# Altium PCB vt18_cpu_board.PcbDoc (part 6 of 7)
Units mil, origin at the board's own origin, x right, y up, seen from the top; angles counter-clockwise.
Board outline 2283.46 x 2244.09 mil, 8 copper layers (Top Layer, GND1, Signal Layer 1, POWER1, POWER2, Signal Layer 2, GND2, Bottom Layer), stack 66.304 mil thick; 339 components, 286 nets, 1965 pads, 1047 vias.
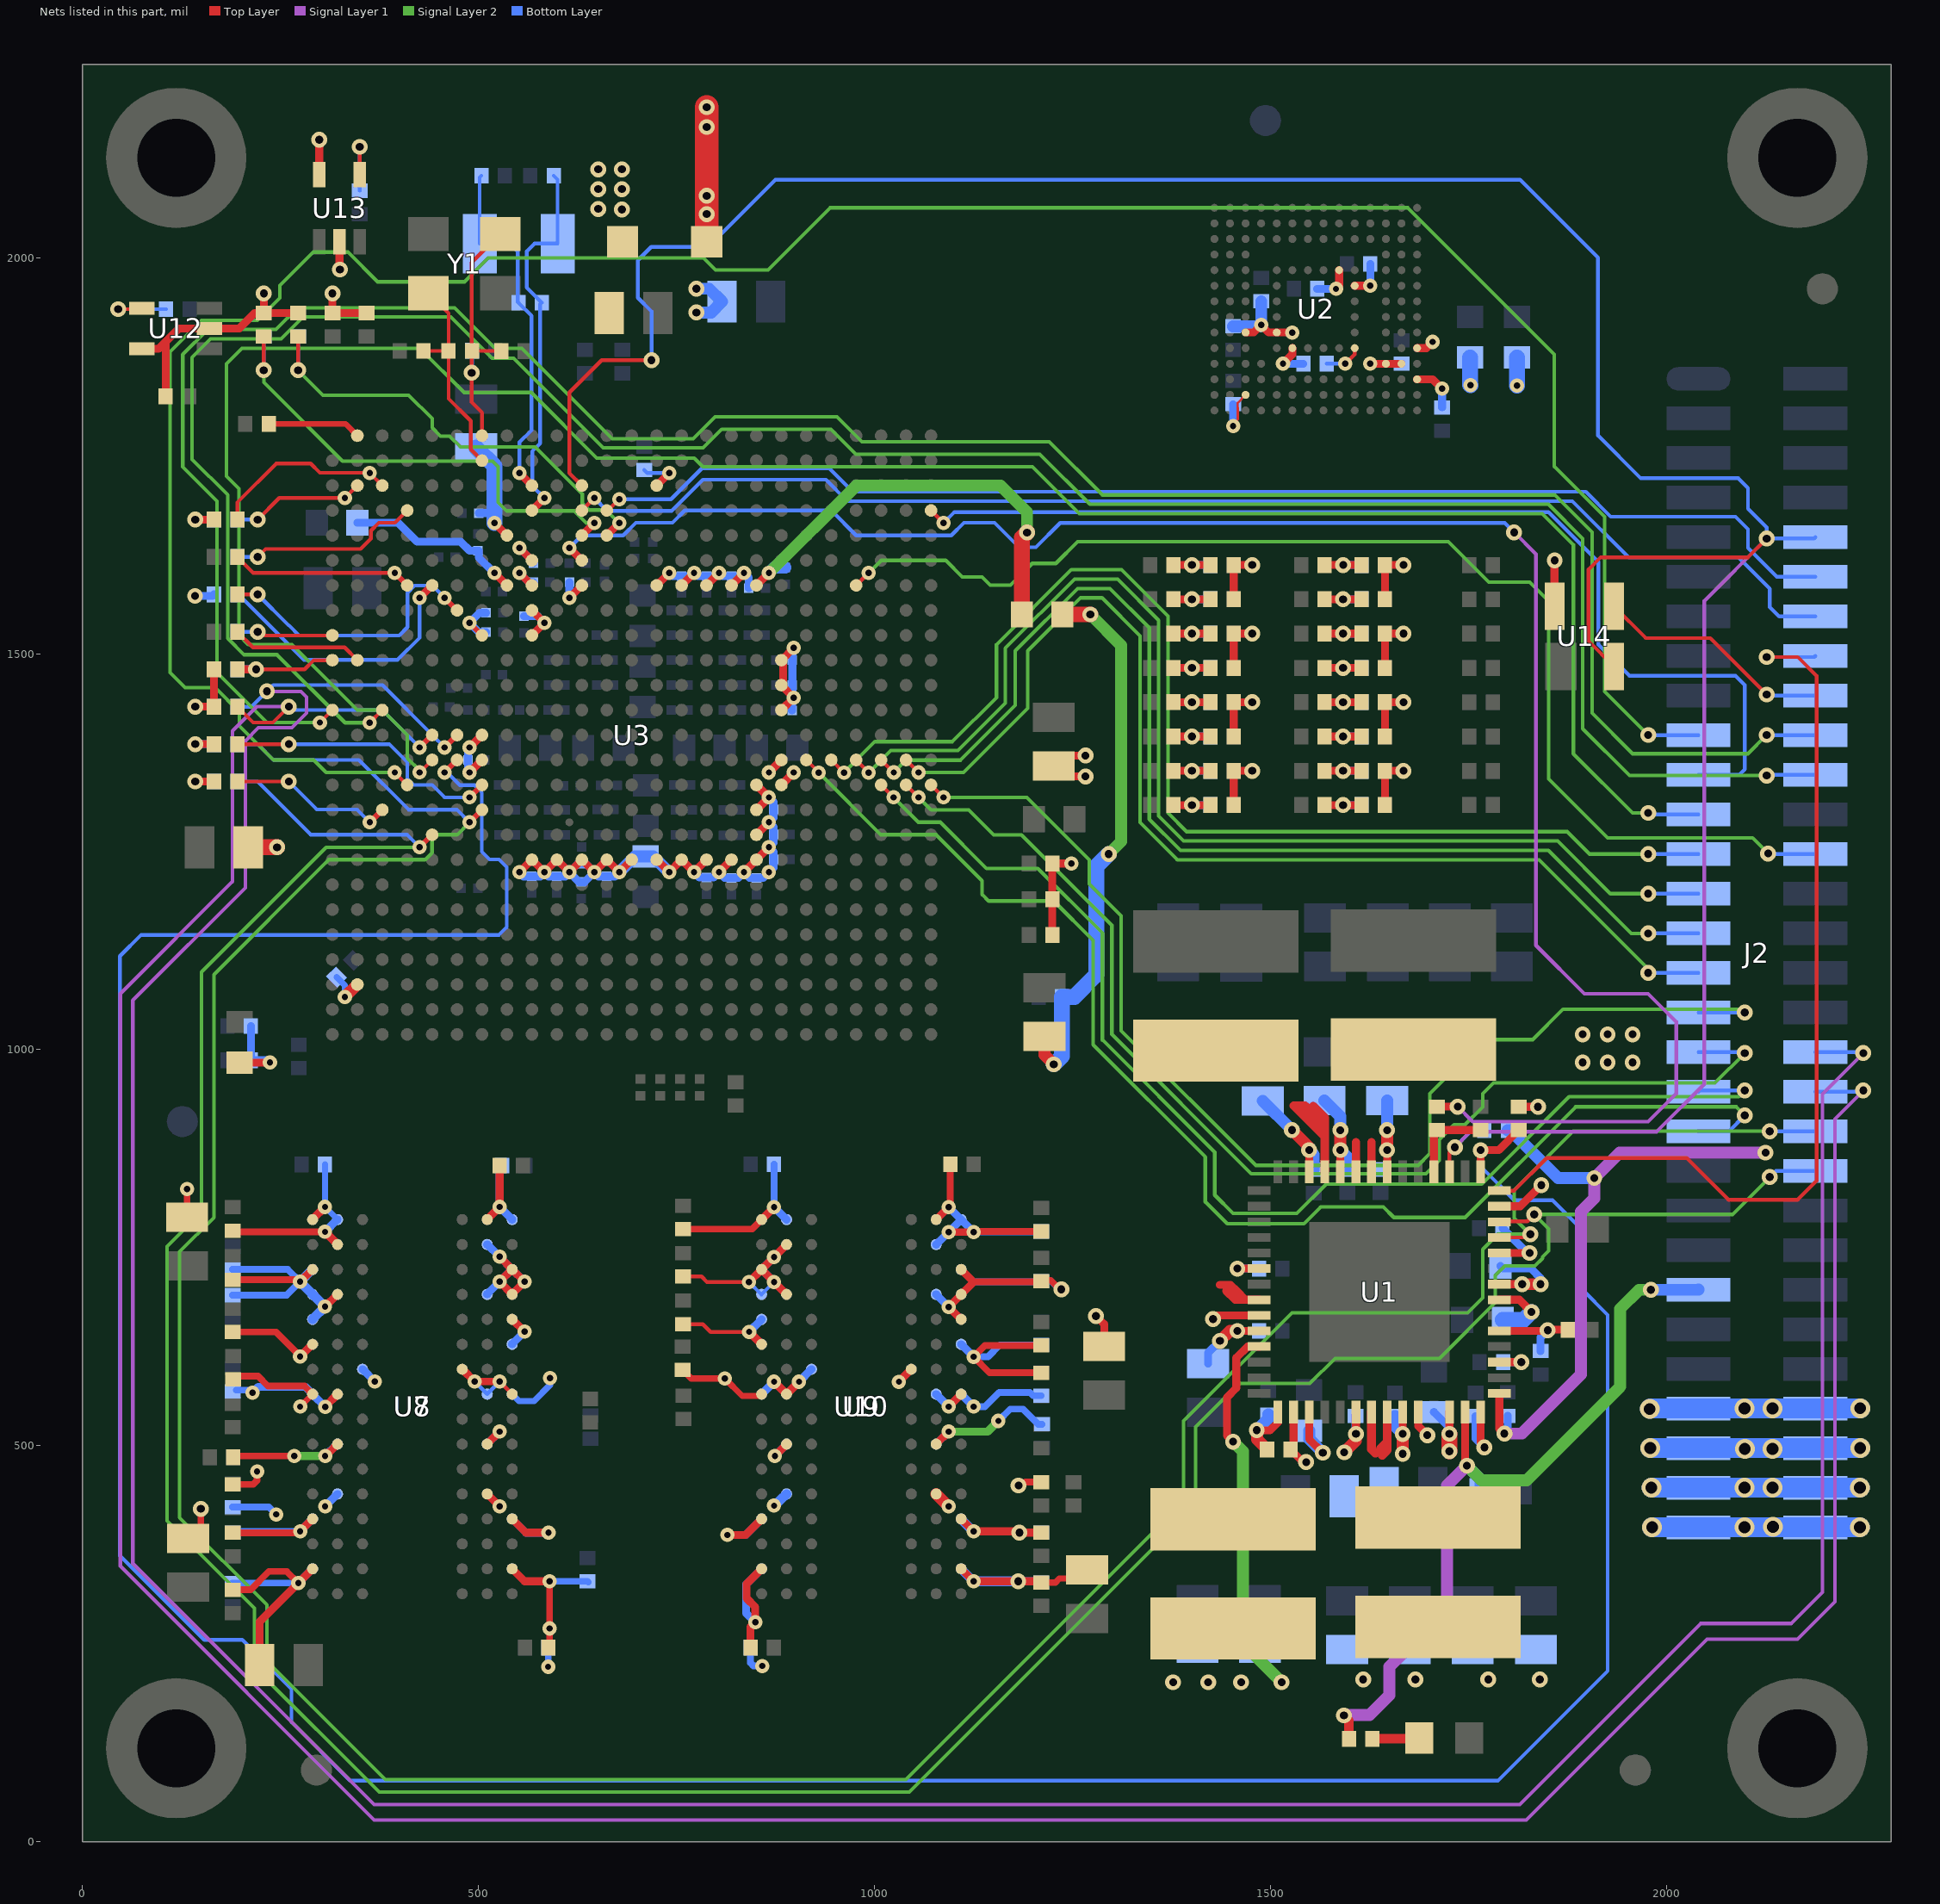
[diagram p12: the nets of this part, all layers, seen from the top]

## Via types
v1: diameter 18, hole 8, Top Layer to Bottom Layer, tented both sides, 718 vias
v2: diameter 20, hole 10, Top Layer to Bottom Layer, tented both sides, 300 vias
v3: diameter 25, hole 15, Top Layer to Bottom Layer, tented both sides, 27 vias
v4: diameter 17.99, hole 7.99, Top Layer to Bottom Layer, tented both sides, 2 vias

## Nets (pads, with @x,y where several pads share a name; then routed paths per layer and width w, separated by ;. In a path a pad name is that pad's centre, name@x,y a point inside that pad or via, vN(x,y) a via of type N, cw(c..) or ccw(c..) an arc to the next point about the centre after c; other vN are vias at no path point) (continued)
GPS-PWREN: J2.21 U3.D25 | length 1359.1
  Top Layer w4.7: U3.D25@1071.33,1680.8 v1(1087.08,1665.06)
  Bottom Layer w4.7: v1(1087.08,1665.06) 1100.86,1678.84 1850.86,1678.84 1913.85,1615.85 1913.85,1511.52 1953.22,1472.15 2087.08,1472.15 2098.89,1460.34 2098.89,1354.04 2091.9,1347.05 J2.21@2040.35,1347.05
HDMI-HDP: C112.2 R26.1 U3.K1 | length 148.4
  Top Layer w4.7: v2(219.04,1480.34) 280.39,1480.34 291.88,1491.83 U3.K1@315.43,1491.83
  Top Layer w10: R26.1@195.42,1480.34 v2(219.04,1480.34)
  Bottom Layer w10: C112.2@195.42,1480.34 v2(219.04,1480.34)
I2C1-SCL: J2.38 R14.2 U3.N5 | length 4621.4
  Top Layer w4.7: R14.2@195.42,1433.09 215.42,1413.09 240.39,1413.09 v2(260.39,1433.09)
  Top Layer w7: v1(425.66,1381.59) U3.N5@441.41,1397.34
  Signal Layer 1 w4.5: v2(260.39,1433.09) 220.03,1433.09 189.44,1402.5 189.44,1212.31 47.71,1070.58 47.71,348.01 368.17,27.56 1822.83,27.56 2051.18,255.91 2165.35,255.91 2212.6,303.15 2212.6,912.63 v2(2248.5,948.53)
  Signal Layer 2 w4.5: v1@424.67,1381.59 v1(425.66,1381.59)
  Bottom Layer w4.7: v2(260.39,1433.09) 264.65,1428.83 378.42,1428.83 v1(425.66,1381.59) ; J2.38@2187.99,947.05 2247.02,947.05 v2(2248.5,948.53)
I2C1-SDA: J2.36 R12.2 U3.N6 | length 4724.6
  Top Layer w7: v1(457.16,1381.59) U3.N6@472.91,1397.34
  Signal Layer 1 w4.5: v2(232.75,1452.46) 275.58,1452.46 282.97,1445.08 282.97,1424.93 264.47,1406.44 221.93,1406.44 205.48,1389.98 205.48,1204.29 63.46,1062.27 63.46,351.54 368.05,46.95 1814.67,46.95 2043.26,275.54 2157.43,275.54 2196.85,314.96 2196.85,944.12 v2(2248.5,995.77)
  Bottom Layer w4.7: R12.2@195.42,1433.09 213.38,1433.09 240.63,1460.34 378.81,1460.34 441.09,1398.06 441.09,1397.66 v1(457.16,1381.59) ; J2.36@2187.99,997.05 2247.22,997.05 v2(2248.5,995.77)
I2C2-SCL: J2.42 R16.2 U1.54 U3.U5 | length 4109.7
  Top Layer w4.7: U1.54@1789.02,782.72 1789.65,783.35 1824.35,783.35 v2(1833,792)
  Top Layer w7: v1(425.66,1255.61) U3.U5@441.41,1271.36
  Signal Layer 2 w4.5: v1(425.66,1255.61) 307.55,1255.61 150.07,1098.13 150.07,794.98 106.77,751.68 106.77,405.22 217,294.98 217,220.18 374.48,62.7 1043.77,62.7 1405.5,424.43 1405.5,523.62 1460.47,578.59 1549.59,578.59 1581.39,610.39 1713.39,610.39 1783.93,680.93 1783.93,715.03 1796,727.1 1833.86,727.1 1843.38,736.62 1843.38,738.49 1851,746.11 1851,774 v2(1833,792) 2083.16,792 v2(2130.39,839.23)
  Bottom Layer w4.7: R16.2@195.42,1338.6 221.02,1338.6 287.95,1271.67 409.59,1271.67 v1(425.66,1255.61) ; v2(2130.39,839.23) 2138.21,847.05 J2.42@2187.99,847.05
I2C2-SDA: J2.40 R15.2 U1.53 U3.T7 | length 4252.1
  Top Layer w4.7: U1.53@1789.02,763.04 1824.04,763.04 v2(1828,767)
  Top Layer w7: v1(488.65,1287.1) U3.T7@504.4,1302.85
  Signal Layer 2 w4.5: 306.93,1235.93 165.82,1094.82 165.82,788.17 122.51,744.86 122.51,409.28 232.75,299.04 232.75,228.06 382.36,78.45 1039.45,78.45 1390.23,429.23 1390.23,531.2 1527.03,668 1749,668 1768,687 1768,748 1787,767 v2@1827.66,767 ; v2(1828,767) v2@1827.66,767 ; v2(2130.39,897.05) 1882.06,897.05 1807.55,822.54 1807.55,787.11 v2@1827.66,767
  Signal Layer 2 w4.7: 306.93,1235.93 310.86,1239.86 432.51,1239.86 441.41,1248.77 441.41,1264.38 448.4,1271.36 472.91,1271.36 v1(488.65,1287.1)
  Bottom Layer w4.7: R15.2@195.42,1385.85 221.02,1385.85 241.01,1365.85 348.96,1365.85 411.64,1303.17 472.58,1303.17 v1(488.65,1287.1) ; v2(2130.39,897.05) J2.40@2187.99,897.05
I2C3-SCL: R18.2 U3.R7 | length 356.6
  Top Layer w4.7: R18.2@195.42,1385.85 v2(260.39,1385.85)
  Top Layer w7: v1(488.65,1318.6) U3.R7@504.4,1334.35
  Signal Layer 2 w4.5: v1@487.66,1318.6 v1(488.65,1318.6)
  Bottom Layer w4.7: v2(260.39,1385.85) 387.26,1385.85 409.92,1363.19 409.92,1342.23 417.79,1334.35 441.41,1334.35 457.16,1318.6 v1(488.65,1318.6)
I2C3-SDA: R17.2 U3.T3 | length 210.9
  Top Layer w4.7: R17.2@195.42,1338.6 v2(260.39,1338.6)
  Top Layer w7: v1(362.67,1287.1) U3.T3@378.42,1302.85
  Bottom Layer w4.7: v2(260.39,1338.6) 295.74,1303.25 346.52,1303.25 v1(362.67,1287.1)
IO1: J2.31 U3.P24 | length 1478
  Top Layer w4.7: U3.P24@1039.84,1365.84 v1(1055.59,1350.1)
  Signal Layer 2 w4.5: v1(1055.59,1350.1) 1112.53,1350.1 1193.38,1430.95 1193.38,1503.65 1260.31,1570.57 1287.13,1570.57 1335.11,1522.59 1335.11,1287.11 1382.36,1239.87 1839.05,1239.87 1976.85,1102.07 v2(1976.85,1097.05)
  Bottom Layer w4.7: v2(1976.85,1097.05) J2.31@2040.35,1097.05
IO2: J2.27 U3.P22 | length 1521.6
  Top Layer w4.7: U3.P22@976.84,1365.84 992.59,1350.09 v1(992.59,1349.78)
  Signal Layer 2 w4.5: v1(992.59,1349.78) 1020.48,1377.66 1105.28,1377.66 1165.21,1437.6 1165.21,1506.97 1252.44,1594.2 1306.8,1594.2 1358.74,1542.26 1358.74,1294.98 1390.23,1263.49 1862.67,1263.49 1929.11,1197.05 v2(1976.85,1197.05)
  Bottom Layer w4.7: v2(1976.85,1197.05) J2.27@2040.35,1197.05
IO3: J2.29 U3.P23 | length 1497.2
  Top Layer w4.5: v1@1024.07,1350.11 v1(1024.31,1350.1)
  Top Layer w4.7: U3.P23@1008.34,1365.84 v1@1024.07,1350.11
  Signal Layer 2 w4.5: v1(1024.31,1350.1) 1039.84,1365.63 1108.55,1365.63 1177.63,1434.71 1177.63,1503.65 1256.37,1582.39 1297.32,1582.39 1346.92,1532.78 1346.92,1291.05 1386.29,1251.68 1850.86,1251.68 1955.69,1146.84 v2(1976.85,1146.84)
  Bottom Layer w4.5: v2(1976.85,1146.84) v2@1977.05,1147.05
  Bottom Layer w4.7: v2@1977.05,1147.05 J2.29@2040.35,1147.05
IO4: J2.25 U3.P21 | length 1541.2
  Top Layer w4.7: U3.P21@945.35,1365.84 v1(961.38,1349.78)
  Signal Layer 2 w4.5: v1(961.38,1349.78) 1000.6,1389 1098.26,1389 1154.01,1444.75 1154.01,1511.52 1248.5,1606.01 1311.99,1606.01 1370.55,1547.45 1370.55,1298.92 1394.17,1275.3 1874.48,1275.3 1902.74,1247.05 v2(1976.85,1247.05)
  Bottom Layer w4.7: v2(1976.85,1247.05) J2.25@2040.35,1247.05
IO5: J2.39 U3.P20 | length 1691.6
  Top Layer w4.7: U3.P20@913.85,1365.84 929.6,1350.09 v1(929.6,1349.78)
  Signal Layer 2 w4.7: v1(929.6,1349.78) 1008.01,1271.36 1077.86,1271.36 1135.77,1213.45 1135.77,1196.08 1144.03,1187.82 1226.25,1187.82 1276.06,1138.02 1276.06,1006.22 1417.79,864.48 1417.79,807.9 1445.35,780.34 1542.23,780.34 1563.45,801.56 1642.45,801.56 1655.74,788.27 1745.73,788.27 1885.26,927.8 2088.12,927.8 v2(2098.89,917.03)
  Bottom Layer w4.7: J2.39@2040.35,897.05 2078.91,897.05 v2(2098.89,917.03)
IO6: J2.33 U3.R25 | length 1515.5
  Top Layer w4.7: U3.R25@1071.33,1334.35 v1(1087.08,1318.61)
  Signal Layer 2 w4.5: v1(1087.08,1318.61) 1192.45,1318.61 1271.19,1239.87 1271.19,1209.3 1311.49,1169 1311.49,1023.97 1481.43,854.04 1686.39,854.04 1701.26,868.91 1701.26,944.59 1769.4,1012.73 1831.16,1012.73 1869.32,1050.89 2094.96,1050.89 v2(2098.89,1046.95)
  Bottom Layer w4.7: J2.33@2040.35,1047.05 2098.8,1047.05 v2(2098.89,1046.95)
IO7: J2.37 U3.R23 | length 1548.8
  Top Layer w4.7: U3.R23@1008.34,1334.35 v1(1024.09,1318.6)
  Signal Layer 2 w4.7: v1(1024.09,1318.6) 1055.36,1287.33 1082.92,1287.33 1141.34,1228.91 1206.14,1228.91 1287.87,1147.19 1287.87,1012.35 1429.6,870.62 1429.6,816.46 1452.72,793.34 1533.22,793.34 1570.29,830.42 1766.75,830.42 1876.98,940.65 2091.02,940.65 v2(2098.89,948.53)
  Bottom Layer w4.7: J2.37@2040.35,947.05 2041.83,948.53 v2(2098.89,948.53)
IO8: J2.35 U3.R24 | length 1490.4
  Top Layer w4.7: U3.R24@1039.84,1334.35 v1(1055.59,1318.6)
  Signal Layer 2 w4.5: v1(1055.59,1318.6) 1071.33,1302.86 1119.03,1302.86 1150.52,1271.36 1185.51,1271.36 1299.68,1157.19 1299.68,1019.39 1475.75,843.32 1696.07,843.32 1713.07,860.32 1713.07,886.48 1731.81,905.22 1745.42,905.22 1768,927.8 1768,944.41 1781.61,958.01 2061.13,958.01 v2(2098.89,995.77)
  Bottom Layer w4.5: J2.35@2040.35,997.05 2097.62,997.05 v2(2098.89,995.77)
JTAG-TDI: R22.1 U3.G5 | length 348.8
  Top Layer w10: v1(425.66,1570.57) U3.G5@441.41,1586.32
  Bottom Layer w4.7: R22.1@195.42,1574.82 196.89,1574.82 279.57,1492.15 397.64,1492.15 425.66,1520.16 v1(425.66,1570.57)
JTAG-TMS: R21.1 U3.C3 | length 236.6
  Top Layer w4.7: R21.1@195.42,1669.31 195.42,1690.96 244.64,1740.18 287.95,1740.18 299.67,1728.45 362.27,1728.45 v1(362.67,1728.05) U3.C3@378.42,1712.3
JTAG-TRST: R23.1 U3.C2 | length 172.1
  Top Layer w4.7: v2(221.02,1669.31) 248.25,1696.55 v1(331.17,1696.55) ; v1@331.49,1696.87 U3.C2@346.92,1712.3
  Signal Layer 1 w10: v1(331.17,1696.55) v1@331.17,1699.8
  Bottom Layer w4.7: R23.1@195.42,1669.31 v2(221.02,1669.31)
MAIN-POWER: C1.1 C4.1 C12.1 C13.1 C18.1 C19.1 C24.1 C25.1 C26.1 C27.1 C30.1 C31.1 C32.1 C35.1 C36.1 C37.2 J2.57 J2.58 J2.59 J2.60 U1.7 U1.10 U1.12 U1.20 U1.23 U1.24 U1.34 U1.37 U1.40 U1.45 U1.50 | length 1499.6
  Top Layer w10: v2(1427.41,659.89) 1432.12,664.61 U1.23@1485.72,664.61 ; v2(1458.16,644.93) U1.24@1485.64,644.93 ; v2(1458.16,723.67) U1.20@1485.64,723.67 ; U1.12@1548.79,845.79 v2(1548.79,873.35) ; U1.10@1588.16,845.79 v2(1588.16,873.27) ; v2(1607.83,514.93) U1.34@1607.83,542.42 ; U1.7@1647.21,845.79 v2(1647.21,873.27) ; v2(1666.89,514.93) U1.37@1666.89,542.42 ; v2(1725.95,515.01) U1.40@1725.95,542.49 ; U1.50@1789.02,703.98 v2(1817.68,703.98) ; U1.45@1789.02,605.56 v2(1816.57,605.56)
  Top Layer w15: v2(1436.15,632.34) 1448.74,644.93 v2(1458.16,644.93) ; v2(1527.06,898.54) 1548.79,876.81 v2(1548.79,873.35) ; v2(1588.16,873.27) v2(1588.16,898.47) ; v2(1593.06,491.67) 1607.83,506.45 v2(1607.83,514.93) ; v2(1647.21,873.27) v2(1647.21,898.47) ; v2(1666.89,489.74) v2(1666.89,514.93) ; v2(1817.68,703.98) v2(1840.91,703.98)
  Top Layer w20: v2(1725.95,492.96) v2(1725.95,515.01)
  Bottom Layer w10: C36.1@1421.22,603.59 1421.22,617.42 v2(1436.15,632.34) ; v2(1458.16,723.67) C32.1@1485.64,723.67 ; C27.1@1607.44,537.84 1607.44,515.32 v2(1607.83,514.93) ; C4.1@1706.27,542.49 1725.95,522.81 v2(1725.95,515.01) ; C1.1@1790.18,727 1793.51,723.67 1829,723.67 1840.91,711.76 v2(1840.91,703.98) ; C37.2@1793.66,605.56 v2(1816.57,605.56)
  Bottom Layer w15: C31.1@1490.12,935.48 v2(1527.06,898.54) ; v2(1548.79,873.35) 1554.69,867.45 C30.1@1554.69,848.47 ; C25.1@1568.07,935.87 1588.16,915.79 v2(1588.16,898.47) ; v2(1588.16,873.27) 1596.81,864.61 C24.1@1596.81,848.86 ; v2(1647.21,898.47) C19.1@1647.21,935.87 ; C12.1@1657.05,537.45 1657.05,524.78 v2(1666.89,514.93)
  Bottom Layer w25: v3(1980.83,447.05) J2.57@2040.35,447.05 J2.58@2187.99,447.05 v3(2244.09,447.05) ; v3(1981.89,397.05) J2.59@2040.35,397.05 J2.60@2187.99,397.05 v3(2244.19,397.05)
  other v3: 2098.43,397.05 2134.33,397.64 2098.43,447.05 2133.86,447.05
MODEM-PWR-EN: J2.23 U3.P5 | length 2955.1
  Top Layer w4.7: v1(425.66,1350.11) U3.P5@441.39,1365.84
  Signal Layer 2 w4.5: v1(425.66,1350.11) 425.66,1352.49 409.92,1368.23 409.92,1397.33 378.4,1428.84 346.92,1428.84 264.25,1511.52 209.13,1511.52 197.32,1523.33 197.32,1708.37 181.57,1724.12 181.57,1865.85 201.25,1885.54 425.89,1885.54 481.6,1829.83 566.53,1829.83 649.31,1747.05 772.3,1747.05 783.19,1736.16 1199.34,1736.16 1258.62,1676.87 1842.99,1676.87 1882.36,1637.5 1882.36,1373.72 1957.16,1298.92 v2(1976.85,1298.92)
  Bottom Layer w4.7: v2(1976.85,1298.92) 1978.72,1297.05 J2.23@2040.35,1297.05
MR: J2.18 U14.3 | length 307.9
  Top Layer w4.7: U14.3@1926.86,1559.96 U14.3@1933.61,1559.96 1973.89,1519.68 2055.29,1519.68 v2(2126.45,1448.53)
  Bottom Layer w4.7: v2(2126.45,1448.53) 2127.93,1447.05 J2.18@2187.99,1447.05
MX6-ONOFF: J2.12 U3.D12 | length 1618.9
  Top Layer w4.7: U3.D12@661.88,1680.8 663.43,1680.8 v1(677.63,1695)
  Bottom Layer w4.7: v1(677.63,1695) 743,1695 782.18,1734.18 942.7,1734.18 972.44,1704.43 1898.11,1704.43 1929.6,1672.94 2087.08,1672.94 2102.83,1657.19 2102.83,1633.57 2139.35,1597.05 J2.12@2187.99,1597.05
NetC3_1: C3.1 U1.52 | length 85.4
  Top Layer w10: U1.52@1789.02,743.35 v2(1827.13,743.35)
  Bottom Layer w10: C3.1@1792.88,774.85 1824.38,743.35 v2(1827.13,743.35)
NetC5_1: C5.1 U1.49 | length 87.3
  Top Layer w10: U1.49@1789.02,684.3 1814.13,684.3 v2(1829.49,668.94)
  Bottom Layer w20: C5.1@1793.18,659 1819.55,659 v2(1829.49,668.94)
NetC8_2: C8.2 C10.1 U1.29 | length 98.5
  Top Layer w10: v2@1483.03,519.34 1499.18,519.34 1509.42,529.58 U1.29@1509.42,542.49
  Top Layer w15: v2@1483.03,519.34 1483.03,507.93 C8.2@1495.64,495.32
  Bottom Layer w15: v2(1482.64,519.73) 1497.21,534.3 C10.1@1497.21,539.42
NetC91_1: C91.1 U3.G9 | length 44.6
  Top Layer w10: v1@551.65,1602.07 U3.G9@567.4,1586.32
  Bottom Layer w10: v1(551.65,1602.07) 563.54,1590.18 C91.1@569.05,1590.18
NetC100_1: C100.1 C101.1 U3.E8 | length 146.3
  Top Layer w10: v1(520.15,1665.06) U3.E8@535.9,1649.31
  Bottom Layer w10: C100.1@500.15,1677.58 519.57,1677.58
  Bottom Layer w20: C101.1@497,1760.1 520.15,1736.95 v1(520.15,1665.06)
NetC114_1: C114.1 C115.1 U3.F9 | length 126.6
  Top Layer w10: v1(551.65,1633.56) U3.F9@567.4,1617.81
  Bottom Layer w10: v1(551.65,1633.56) 569.44,1615.77 C115.1@569.44,1614.19
  Bottom Layer w15: v2(775,1930.75) 793.71,1930.75 C114.1@807.55,1944.59 791.4,1960.75 v2(775,1960.75)
NetC117_1: C117.1 R27.1 R30.2 U3.A7 Y1.1 | length 340.6
  Top Layer w4.7: U3.A7@504.4,1775.29 504.4,1804.4 491.27,1817.53 v2(491.27,1854.7) 491.27,1882.28 R27.1@491.27,1882.68 ; Y1.1@527.32,2029.94 491.27,1993.89 R27.1@491.27,1882.68 ; R30.2@528.68,1881.89 528.28,1882.28 R27.1@491.66,1882.28 R27.1@491.27,1882.68
  Bottom Layer w4.7: v2(491.27,1854.7) 491.7,1855.13 C117.1@491.7,1882.4
NetC118_1: C118.1 R27.2 U3.B7 Y1.3 | length 271.3
  Top Layer w4.7: C118.1@430.24,1882.28 R27.2@462.14,1882.28 ; Y1.3@436.76,1955.14 462.14,1929.76 R27.2@462.14,1882.28 ; U3.B7@504.4,1743.8 490.15,1758.05 490.15,1793.85 462.14,1821.86 R27.2@462.14,1882.28
NetC119_1: C119.1 R28.1 U3.D9 Y2.1 | length 480.9
  Top Layer w10: U3.D9@567.41,1680.8 v1(583.16,1696.55)
  Bottom Layer w4.7: R28.1@577.8,1941.1 577.8,1765.52 567.79,1755.51 567.79,1711.92 v1(583.16,1696.55) ; R28.1@579.9,1943.2 560.8,1962.3 560.8,2008 570.6,2017.8 Y2.1@599.8,2017.8 599.8,2098.7 C119.1@594.9,2103.6
NetC120_1: C120.1 R28.2 U3.C9 Y2.2 | length 454.6
  Top Layer w10: v1(551.65,1728.05) U3.C9@567.4,1712.3
  Bottom Layer w4.7: C120.1@503.6,2103.6 501.38,2101.38 Y2.2@501.38,2017.8 539.5,2017.8 549.3,2008 549.3,1944.28 R28.2@550.38,1943.2 567,1926.58 567,1782.3 551.65,1766.95 v1(551.65,1728.05)
NetC124_1: C124.1 L5.2 U3.G8 | length 226.5
  Top Layer w10: v1@520.15,1602.07 U3.G8@535.9,1586.32
  Bottom Layer w10: L5.2@347,1665.38 398.48,1665.38 422.49,1641.36 477.4,1641.36 488.78,1629.98 C124.1@499,1629.98 500.15,1629.98 500.15,1621.67 519.75,1602.07 v1(520.15,1602.07)
NetC198_1: C198.1 U2.C2 | length 73.6
  Top Layer w3: v1(1452.72,1787.4) 1452.72,1790 1458.62,1795.9 1458.62,1811.15 1458.45,1811.31 1458.45,1816.72 U2.C2@1468.5,1826.77
  Bottom Layer w10: v1(1452.72,1787.4) v1(1452.72,1787.4) C198.1@1452.76,1814.96
NetD1_1: D1.1 R3.2 | length 59.5
  Top Layer w12: R3.2@1628.52,130 D1.1@1687,130 ; D1.1@1687,131 D1.1@1688,131
NetL1_1: L1.1 U1.35 U1.36 | length 122.2
  Top Layer w11: U1.35@1627.53,542.49 1627.53,495.53 1632.36,490.69 ; 1639.22,497.1 1647.21,505.09 ; 1641,488 1647.21,494.21 1647.21,505.09 ; U1.36@1647.21,542.49 1647.21,505.09
NetL2_1: L2.1 U1.8 U1.9 | length 75.1
  Top Layer w10: U1.9@1607.84,845.79 1607.84,883.34 ; U1.8@1627.53,845.79 1627.53,883.34
NetL3_1: L3.1 U1.11 | length 193.4
  Top Layer w11: 1553.76,928.9 1568.47,914.19 1568.47,904.51 ; U1.11@1568.47,845.79 1568.47,890.44 ; 1568.47,890.44 1529.56,929.34 1543.63,929.34 1568.47,904.51 ; 1568.47,890.44 1568.47,904.51
NetL4_1: L4.1 U1.22 | length 99.3
  Top Layer w10: 1436,703 1449.55,703 1456.98,695.57 ; U1.22@1485.72,684.3 1468.25,684.3 ; 1456.98,695.57 1468.25,684.3 ; 1456.98,695.57 1444.02,695.57 1455.3,684.3 1468.25,684.3
NetR2_2: R2.2 R4.2 U1.4 | length 109.6
  Top Layer w10: U1.4@1706.27,845.79 1706.27,894.72 R2.2@1710.09,898.54 1765.24,898.54 R4.2@1765.32,898.47
NetR5_2: R5.2 R6.2 U1.47 | length 117.1
  Top Layer w10: U1.47@1789.02,644.93 1849.18,644.93 v2(1849.96,645.72) 1850.75,646.5 R5.2@1875.56,646.5
  Bottom Layer w10: R6.2@1841,619.52 1841,636.75 v2(1849.96,645.72)
NetR19_1: R19.1 U3.D4 | length 244.7
  Top Layer w4.7: v2(221.02,1622.07) 231.11,1632.16 351,1632.16 364.07,1645.23 364.07,1655.26 374.19,1665.38 394.49,1665.38 U3.D4@409.92,1680.8
  Bottom Layer w4.7: R19.1@195.42,1622.07 v2(221.02,1622.07)
NetR20_1: R20.1 U3.G4 | length 229.3
  Top Layer w4.7: R20.1@195.42,1622.07 215.41,1602.07 v1(394.17,1602.07)
  Top Layer w7: v1(394.17,1602.07) U3.G4@409.92,1586.32
NetR24_1: R24.1 U3.C14 | length 55.5
  Top Layer w10: U3.C14@724.88,1712.3 v1(740.63,1728.05)
  Bottom Layer w4.7: R24.1@709.08,1732 713.03,1728.05 v1(740.63,1728.05)
NetR25_2: R25.2 U3.H6 | length 363.3
  Top Layer w4.7: R25.2@195.42,1574.82 v2(221.02,1574.82)
  Top Layer w7: v1(457.16,1570.57) U3.H6@472.91,1554.82
  Bottom Layer w4.7: v2(221.02,1574.82) 259.88,1535.95 260.39,1535.95 273.3,1523.04 399.84,1523.04 410.31,1533.5 410.31,1576.93 419.3,1585.92 441.81,1585.92 v1(457.16,1570.57)
NetR29_1: R29.1 U3.K2 | length 166.3
  Top Layer w4.7: R29.1@195.42,1527.58 215.1,1507.89 330.85,1507.89 U3.K2@346.92,1491.83
NetR31_1: R31.1 U3.J1 | length 122
  Top Layer w4.7: v2(221.02,1527.58) 225.56,1523.04 315.15,1523.04 U3.J1@315.43,1523.32
  Bottom Layer w4.7: R31.1@195.42,1527.58 v2(221.02,1527.58)
NetR32_1: R32.1 U3.A2 | length 118
  Top Layer w7: R32.1@235,1790 332.21,1790 U3.A2@346.92,1775.29
NetR42_1: R42.1 U2.K5 | length 48.2
  Top Layer w4.7: v1(1594.49,1866.14) 1606.3,1877.95 U2.K5@1606.3,1885.83
  Bottom Layer w4.7: R42.1@1570.87,1866.14 v1(1594.49,1866.14)
NetR48_2: R48.2 R83.1 R84.2 | length 69.9
  Top Layer w10: R84.2@1377.39,1395.46 v2(1400.69,1395.46) R48.2@1424,1395.46
  Bottom Layer w10: v2(1400.69,1395.46) R83.1@1424,1395.46
NetR49_2: R49.2 R80.1 R81.2 | length 69.9
  Top Layer w10: R81.2@1377.39,1482.08 v2(1400.69,1482.08) R49.2@1424,1482.08
  Bottom Layer w10: v2(1400.69,1482.08) R80.1@1424,1482.08
NetR50_2: R50.2 R78.1 R79.2 | length 69.9
  Top Layer w10: R79.2@1568.38,1525.37 v2(1591.69,1525.37) R50.2@1614.99,1525.37
  Bottom Layer w10: v2(1591.69,1525.37) R78.1@1614.99,1525.37
NetR51_2: R51.2 R76.1 R77.2 | length 69.9
  Top Layer w10: R77.2@1568.38,1568.68 v2(1591.69,1568.68) R51.2@1614.99,1568.68
  Bottom Layer w10: v2(1591.69,1568.68) R76.1@1614.99,1568.68
NetR52_2: R52.2 R74.1 R75.2 | length 69.9
  Top Layer w10: R75.2@1377.39,1612 v2(1400.69,1612) R52.2@1424,1612
  Bottom Layer w10: v2(1400.69,1612) R74.1@1424,1612
NetR53_2: R53.2 R72.1 R73.2 | length 69.9
  Top Layer w10: R73.2@1568.39,1611.98 v2(1591.69,1611.98) R53.2@1615,1611.98
  Bottom Layer w10: v2(1591.69,1611.98) R72.1@1615,1611.98
NetR54_2: R54.2 R70.1 R71.2 | length 69.9
  Top Layer w10: R71.2@1377.39,1568.69 v2(1400.69,1568.69) R54.2@1424,1568.69
  Bottom Layer w10: v2(1400.69,1568.69) R70.1@1424,1568.69
NetR55_2: R55.2 R68.1 R69.2 | length 69.9
  Top Layer w10: R69.2@1568.38,1482.06 v2(1591.69,1482.06) R55.2@1614.99,1482.06
  Bottom Layer w10: v2(1591.69,1482.06) R68.1@1614.99,1482.06
NetR56_2: R56.2 R100.1 R101.2 | length 69.9
  Top Layer w10: R101.2@1377.39,1308.85 v2(1400.69,1308.85) R56.2@1424,1308.85
  Bottom Layer w10: v2(1400.69,1308.85) R100.1@1424,1308.85
NetR57_2: R57.2 R98.1 R99.2 | length 69.9
  Top Layer w10: R99.2@1377.39,1352.16 v2(1400.69,1352.16) R57.2@1424,1352.16
  Bottom Layer w10: v2(1400.69,1352.16) R98.1@1424,1352.16
NetR58_2: R58.2 R96.1 R97.2 | length 69.9
  Top Layer w10: R97.2@1568.38,1438.76 v2(1591.69,1438.76) R58.2@1614.99,1438.76
  Bottom Layer w10: v2(1591.69,1438.76) R96.1@1614.99,1438.76
NetR59_2: R59.2 R93.1 R94.2 | length 69.9
  Top Layer w10: R94.2@1377.39,1438.77 v2(1400.69,1438.77) R59.2@1424,1438.77
  Bottom Layer w10: v2(1400.69,1438.77) R93.1@1424,1438.77
NetR60_2: R60.2 R91.1 R92.2 | length 69.9
  Top Layer w10: R92.2@1568.38,1308.83 v2(1591.69,1308.83) R60.2@1614.99,1308.83
  Bottom Layer w10: v2(1591.69,1308.83) R91.1@1614.99,1308.83
NetR61_2: R61.2 R89.1 R90.2 | length 69.9
  Top Layer w10: R90.2@1568.38,1395.45 v2(1591.69,1395.45) R61.2@1614.99,1395.45
  Bottom Layer w10: v2(1591.69,1395.45) R89.1@1614.99,1395.45
NetR62_2: R62.2 R87.1 R88.2 | length 69.9
  Top Layer w10: R88.2@1568.38,1352.14 v2(1591.69,1352.14) R62.2@1614.99,1352.14
  Bottom Layer w10: v2(1591.69,1352.14) R87.1@1614.99,1352.14
NetR63_2: R63.2 R85.1 R86.2 | length 69.9
  Top Layer w10: R86.2@1377.39,1525.39 v2(1400.69,1525.39) R63.2@1424,1525.39
  Bottom Layer w10: v2(1400.69,1525.39) R85.1@1424,1525.39
NetR95_2: R95.2 U12.4 | length 91
  Top Layer w4.7: v2(45,1935) 73.8,1935 U12.4@75,1936.2
  Bottom Layer w4.7: v2(45,1935) R95.2@105.48,1935
NetR106_2: R106.2 U13.4 | length 90.6
  Top Layer w4.7: v2(350,2140) 350.09,2139.91 U13.4@350.09,2104.96
  Bottom Layer w4.7: R106.2@350,2084.52 v2(350,2140)
NVCC-RMII: C102.1 R10.2 U3.G18 | length 563
  Top Layer w10: U3.G18@850.86,1586.32 v1(866.61,1602.07)
  Top Layer w20: R10.2@1185.92,1549.6 1185.92,1646.42 v2(1192.5,1653)
  Signal Layer 2 w15: v1(866.61,1602.07) 976.85,1712.31 1159.07,1712.31 1192.5,1678.88 v2(1192.5,1653)
  Bottom Layer w15: v1(866.61,1602.07) 873.22,1608.68 C102.1@887.16,1608.68
P0V75-REFDDR: C7.1 C126.1 C127.1 C128.1 C129.1 C130.1 C131.1 C132.1 C133.1 U1.31 U3.AC2 U7.H1 U7.M8 U8.H1 U8.M8 U9.H1 U9.M8 U10.H1 U10.M8 | length 815.3
  Top Layer w8: v1(274.72,549.34) U8.H1@290.46,565.1 ; C131.1@757.83,595.65 768.64,584.84 v1(810.88,584.84) 832.88,562.84 855.14,562.84 U10.H1@857.39,565.1
  Top Layer w8.5: C132.1@190.19,583.84 194.21,587.85 221.62,587.85 234.23,575.24 280.32,575.24 U8.H1@290.46,565.1 ; v2(1181.87,449.85) 1186.08,449.85 1190.33,454.1 C133.1@1210.38,454.1
  Top Layer w10: U8.M8@510.93,439.11 v1(526.69,423.36) ; U1.31@1548.79,542.49 1548.79,508.38 v2(1566,491.17)
  Top Layer w15: v1(331.17,1066.63) U3.AC2@346.92,1082.38 ; U10.M8@1077.86,439.11 v1(1093.62,423.36)
  Bottom Layer w8: C130.1@320.82,1091.72 331.17,1081.37 v1(331.17,1066.63) ; U7.H1@542.43,565.1 551.13,556.39 570.14,556.39 590.38,576.63 v1(590.38,585.34)
  Bottom Layer w8.5: C128.1@189.45,422.58 235.14,422.58 v1(244.38,413.34) ; v1(587.83,220.94) 588.14,221.65 C129.1@588.14,244.94 ; C126.1@843.38,244.94 843.38,225.84 847.13,222.09 v1(858.38,221.99) ; v1(1125.11,549.34) 1139.38,549.34 1157.43,567.39 1196.02,567.39 1200.33,563.08 C127.1@1210.38,563.08
  Bottom Layer w10: v1(306.22,423.36) U7.M8@321.96,439.11 ; U9.H1@1109.36,565.1 v1(1125.11,549.34)
  Bottom Layer w12: v1(873.14,424.31) U9.M8@888.89,439.11
  Bottom Layer w15: C7.1@1548.78,518.94 1548.78,508.39 v2(1566,491.17)
P1V5-DDR-SW3: C8.1 C20.1 C21.1 C22.1 C23.1 C134.1 C135.1 C136.1 C137.1 C138.1 C139.1 C140.1 C141.1 C142.1 C143.1 C144.1 C145.1 C146.1 C147.1 C148.1 C149.1 C150.1 C151.1 C152.1 C153.1 C154.1 C155.1 C156.1 C157.1 C158.1 C159.1 C160.1 C161.1 C162.1 C163.1 C164.1 C165.1 C166.1 C167.1 C168.1 C169.1 C170.1 C171.1 C172.1 C173.1 C174.1 C175.1 C176.1 C177.1 C178.1 C179.1 C180.1 C181.1 C182.1 C183.1 C184.1 C185.1 C186.1 C187.1 C188.1 C189.1 C190.1 C191.1 L1.2 R10.1 U1.30 U1.38 U3.R18 U3.T18 U3.U18 U3.V9 U3.V10 U3.V11 U3.V12 U3.V13 U3.V14 U3.V15 U3.V16 U3.V17 U3.V18 U7.A1 U7.A8 U7.B2 U7.C1 U7.C9 U7.D2 U7.D9 U7.E9 U7.F1 U7.G7 U7.H2 U7.H9 U7.K2 U7.K8 U7.N1 U7.N9 U7.R1 U7.R9 U8.A1 U8.A8 U8.B2 U8.C1 U8.C9 U8.D2 U8.D9 U8.E9 U8.F1 U8.G7 U8.H2 U8.H9 U8.K2 U8.K8 U8.N1 U8.N9 U8.R1 U8.R9 U9.A1 U9.A8 U9.B2 U9.C1 U9.C9 U9.D2 U9.D9 U9.E9 U9.F1 U9.G7 U9.H2 U9.H9 U9.K2 U9.K8 U9.N1 U9.N9 U9.R1 U9.R9 U10.A1 U10.A8 U10.B2 U10.C1 U10.C9 U10.D2 U10.D9 U10.E9 U10.F1 U10.G7 U10.H2 U10.H9 U10.K2 U10.K8 U10.N1 U10.N9 U10.R1 U10.R9 | length 7393.1
  Top Layer w4.7: v1(526.62,581.09) 542.43,565.28 U8.H9@542.42,565.1
  Top Layer w5: C169.1@758.38,653.58 783.14,653.58 792.89,643.83 v1(841.65,643.83) ; C168.1@758.38,713.58 781.38,713.58 788.38,706.58 v1(841.4,706.58)
  Top Layer w8: C144.1@131.84,788.57 v1(131.84,824) ; C166.1@588.14,244.94 589.68,246.48 v1(589.68,269.34) v1(589.68,328.87) ; C136.1@1210.38,327.35 1228.38,327.35 1233.37,332.34 1257.67,332.34 C182.1@1268.38,343.05
  Top Layer w8.5: C184.1@133.38,383.05 149.28,398.95 v2(149.28,420.34) ; C149.1@189.45,318.1 212.04,318.1 235.33,341.39 257.67,341.39 v1(272.46,326.6) ; C148.1@189.45,390.1 272.96,390.1 v1(274.72,391.86) ; C146.1@189.45,451.1 215.33,451.1 220.33,456.1 v1(220.33,467.34) ; C170.1@189.45,771.58 190.96,770.06 v1(306.14,770.06) ; C147.1@189.7,643.58 244.14,643.58 274.64,613.08 v1(274.64,612.58) ; C151.1@189.7,709.58 272.14,709.58 v1(274.64,707.07) ; C150.1@190.14,485.34 191.88,487.08 v1(267.12,487.08) ; C171.1@758.38,773.58 804.6,773.58 804.63,773.54 845.38,773.54 U10.A1@857.39,785.57 ; v1(1093.62,801.31) 1095.62,803.31 C153.1@1095.62,855.34 ; 1125.11,706.82 1206.62,706.82 C139.1@1210.38,707.58 1211.69,708.89 1222.33,708.89 1233.83,697.39 v2(1235.88,697.39) ; v1(1125.11,769.81) 1125.88,770.58 C152.1@1210.38,770.58 ; C135.1@1210.38,592.1 1145.34,592.1 v1(1125.11,612.33) 1139.36,626.58 C134.1@1210.38,626.58
  Top Layer w9: v1(495.13,581.09) 504.52,581.09 517.36,581.08 v1(526.62,581.09) ; v1(1093.62,769.81) v1(1125.11,769.81)
  Top Layer w10: C191.1@198.18,983.75 236.08,983.75 v1@237.05,983.75 ; C183.1@223.38,223.05 223.38,277.53 228.38,282.53 v1(272.46,326.6) U8.R1@290.46,344.63 ; v1(274.64,612.58) 290.14,628.08 U8.F1@290.46,628.09 ; v1(274.64,707.07) 290.14,722.57 U8.C1@290.46,722.58 ; v1(274.72,391.86) U8.N1@290.46,407.62 ; U8.A1@290.46,785.57 290.47,785.89 v1(306.14,801.56) ; v1(306.14,675.58) 321.63,691.07 U8.D2@321.95,691.08 ; v1(306.14,770.06) 321.96,754.24 U8.B2@321.95,754.07 ; v1(306.22,487.08) 310.48,491.34 311.21,491.34 U8.K2@321.95,502.11 ; v1(306.28,549.09) 306.28,549.4 U8.H2@321.95,565.1 ; U8.G7@479.43,596.59 479.63,596.58 v1(495.13,581.09) ; U8.K8@510.93,502.11 v1(526.69,517.84) ; U8.A8@510.93,785.57 510.94,785.75 510.88,785.81 v1(526.62,801.56) C167.1@526.69,853.74 C167.1@526.69,853.74 ; v1(526.62,738.57) 542.43,722.76 U8.C9@542.42,722.58 ; U8.R9@542.42,344.63 558.18,328.87 v1(589.68,328.87) ; U8.N9@542.42,407.62 559.7,390.34 v1(588.33,390.34) ; U8.E9@542.42,659.59 542.62,659.58 v1(558.12,644.08) ; U8.D9@542.42,691.08 U8.D9@542.43,691.26 ; v1(551.65,1224.11) U3.V9@567.4,1239.86 v1(583.14,1224.11) U3.V10@598.89,1239.86 v1(614.64,1224.11) U3.V11@630.39,1239.86 v1(646.14,1224.11) U3.V12@661.88,1239.86 v1(677.63,1224.11) U3.V13@693.38,1239.86 ; U3.V14@724.88,1239.86 v1(740.62,1224.11) U3.V15@756.37,1239.86 v1(772.12,1224.11) U3.V16@787.87,1239.86 ; v1(803.62,1224.11) U3.V17@819.36,1239.86 ; v1(814.38,387.34) 837.13,387.34 U10.N1@857.39,407.62 ; v1(835.11,1224.11) v1(866.61,1255.61) ; v1(841.4,706.58) U10.C1@857.39,722.58 ; v1(841.65,643.83) U10.F1@857.39,628.09 ; C137.1@843.38,244.94 843.38,271.14 v1(849.38,277.14) 849.38,296.34 838.38,307.34 838.38,325.6 U10.R1@857.39,344.63 ; U3.U18@850.86,1271.36 v1(866.61,1287.1) ; U3.T18@850.86,1302.85 v1(866.61,1318.6) U3.R18@850.86,1334.35 ; U10.A1@857.39,785.57 v1(873.14,801.31) ; v1(873.14,580.84) U10.H2@888.88,565.1 v1(904.64,580.84) ; v1(874.23,487.09) 888.89,501.75 U10.K2@888.88,502.11 ; U10.D2@888.88,691.08 v1(873.14,706.82) U10.C1@857.39,722.58 ; U10.B2@888.88,754.07 v1(873.14,738.32) U10.C1@857.39,722.58 ; v1@1030.62,580.84 1030.67,580.89 U10.G7@1046.36,596.59 ; U10.K8@1077.86,502.11 v1(1093.62,517.84) ; U10.A8@1077.86,785.57 v1(1093.62,801.31) ; v1(1093.62,549.34) U10.H9@1109.35,565.1 ; U10.R9@1109.35,344.63 v1(1125.11,328.87) v2(1181.38,328.87) 1208.86,328.87 C136.1@1210.38,327.35 ; U10.N9@1109.35,407.62 v1(1125.11,391.86) 1181.38,391.86 v2(1182.89,390.35) C138.1@1210.38,390.35 ; U10.E9@1109.35,659.59 v1(1093.62,675.32) U10.D9@1109.35,691.08 1125.11,706.82 U10.C9@1109.35,722.58 ; v2(1279.53,663.8) 1290,653.33 C145.1@1290,625.24 ; U1.30@1529.1,542.49 1529.1,499.26 C8.1@1525.16,495.32 1541.14,479.34 v2(1545,479.34) ; U1.38@1686.58,542.49 1686.58,524.77 v2(1698,513.34) ; U8.D9@542.43,691.26 v1(526.62,707.07) 542.12,722.57 U8.C9@542.42,722.58 ; U8.D9@542.43,691.26 542.43,691.38 v1(558.12,707.07) 542.62,722.57 U8.C9@542.42,722.58
  Top Layer w15: C165.1@1214.52,1016.91 1214.52,993.29 v2(1226.33,981.48)
  Top Layer w20: R10.1@1237.1,1549.6 v2(1272.5,1549.6)
  Signal Layer 2 w10: v1(267.12,487.08) v1(306.22,487.08) ; v1(1093.62,517.84) 1142.88,517.84 v1(1156.38,531.34)
  Signal Layer 2 w15: v2(1272.5,1549.6) 1311.49,1510.61 1311.49,1262.79 v2(1295.74,1247.05)
  Bottom Layer w4.7: v1(495.13,581.09) U7.H2@510.94,565.28 ; U7.H2@510.94,565.1 U7.H2@510.94,565.28 ; v1(526.62,581.09) 510.94,565.41 U7.H2@510.94,565.28 ; U9.C9@857.4,722.58 v1(841.4,706.58) 856.91,691.07 U9.D9@857.4,691.08 v1(873.14,706.82) ; v2(1182.89,390.35) C164.1@1210.38,390.35
  Bottom Layer w8: C181.1@306.21,855.34 C181.1@306.14,855.27 v1(306.14,801.56) U7.A8@321.96,785.74 ; U7.R1@542.43,344.63 558.18,328.87 v1(589.68,328.87) C179.1@637.41,328.87 C179.1@638.45,327.83
  Bottom Layer w8.5: C158.1@189.38,326.6 v1(272.46,326.6) ; C157.1@189.38,390.1 193.14,391.86 v1(274.72,391.86) ; C156.1@189.45,690.1 257.67,690.1 v1(274.64,707.07) 259.14,722.58 C154.1@189.45,722.58 ; C155.1@194.15,570.27 211.59,570.27 v1(214.74,567.12) ; v1(873.14,801.31) C160.1@873.14,855.34 ; U9.C1@1109.36,722.58 1125.11,706.82 1206.62,706.82 C161.1@1210.38,707.58 1211.69,708.89 1221.83,708.89 1233.33,697.39 v2(1235.88,697.39) ; v1(1125.11,612.33) 1143.38,612.33 1158.39,627.34 1207.12,627.34 C162.1@1210.38,627.08 ; v1(1125.11,769.81) 1206.62,769.81 C142.1@1210.38,770.58 ; v1(1156.38,531.34) 1171.38,546.34 1187.38,546.34 1206.62,527.1 C163.1@1211.38,527.1
  Bottom Layer w10: C141.1@212.55,1029.91 C140.1@212.55,986.6 233.81,986.6 v1(236.57,983.84) ; v1(214.74,567.12) 221.96,574.34 281.38,574.34 290.47,565.25 290.47,564.9 v1(306.28,549.09) ; v1(272.46,326.6) U7.R9@290.47,344.63 ; v1(274.72,391.86) U7.N9@290.47,407.62 ; v1(306.14,770.06) 321.8,785.73 321.88,785.81 321.96,785.73 U7.A8@321.96,785.57 ; v1(306.22,487.08) 321.6,502.47 321.96,502.83 U7.K8@321.96,502.11 ; U7.G7@353.46,596.59 353.46,596.76 v1(369.13,581.09) ; U7.K2@510.94,502.11 v1(526.69,517.84) ; U7.D2@510.94,691.08 510.94,691.39 v1(526.62,707.07) 542.12,722.57 U7.C1@542.43,722.58 ; U7.B2@510.94,754.07 511.13,754.06 v1(526.62,738.57) 542.43,722.76 U7.C1@542.43,722.58 ; C178.1@529.62,853.74 526.62,850.74 v1(526.62,801.56) 542.43,785.75 U7.A1@542.43,785.57 ; U7.N1@542.43,407.62 559.7,390.34 v1(588.33,390.34) ; U7.F1@542.43,628.09 542.43,628.39 v1(558.12,644.08) ; v1(551.65,1224.11) 556.88,1218.88 C189.1@567.28,1218.88 577.91,1218.88 v1(583.14,1224.11) 588.37,1218.88 C177.1@598.77,1218.88 609.41,1218.88 v1(614.64,1224.11) ; v1(558.12,707.07) 542.62,722.57 U7.C1@542.43,722.58 ; v1(677.63,1224.11) 672.4,1218.88 C185.1@661.76,1218.88 651.37,1218.88 v1(646.14,1224.11) ; v1(772.12,1224.11) 778.92,1217.31 C176.1@787.75,1217.31 796.81,1217.31 v1(803.62,1224.11) 810.82,1216.91 C175.1@819.24,1216.91 827.91,1216.91 v1(835.11,1224.11) 842.31,1216.91 C174.1@851.13,1216.91 859.41,1216.91 v1(866.61,1224.11) ; v1(814.38,387.34) 837.13,387.34 U9.N9@857.4,407.62 ; v1(841.65,643.83) U9.E9@857.4,659.59 ; v1(849.38,277.14) 837.81,288.71 837.81,325.03 U9.R9@857.4,344.63 ; U9.H9@857.4,565.1 v1(873.14,580.84) ; v1(866.61,1255.61) 872.39,1249.83 C172.1@872.39,1240.14 v1@872.39,1229.9 ; v1(866.61,1287.1) 872.39,1281.32 C188.1@872.39,1271.64 v1@872.39,1261.4 ; v1(866.61,1318.6) 872.39,1312.82 C187.1@872.39,1303.14 v1@872.39,1292.89 ; v1(873.14,706.82) U9.C9@857.4,722.58 v1(873.14,738.32) ; v1(873.14,801.31) U9.A8@888.89,785.57 ; v1(874.23,487.09) 888.89,501.75 U9.K8@888.89,502.11 ; v1(904.64,580.84) U9.G7@920.39,596.59 ; U9.K2@1077.87,502.11 v1(1093.62,517.84) ; U9.H2@1077.87,565.1 v1(1093.62,549.34) ; U9.D2@1077.87,691.08 v1(1093.62,675.32) ; U9.B2@1077.87,754.07 v1(1093.62,769.81) U9.A1@1109.36,785.57 ; v1(1093.62,801.31) U9.A1@1109.36,785.57 ; U9.F1@1109.36,628.09 v1(1125.11,612.33) ; v1(1125.11,769.81) U9.A1@1109.36,785.57 ; v2(1181.38,328.87) 1208.86,328.87 C180.1@1210.38,327.35 ; v1(614.64,1224.11) 626.96,1211.8 C173.1@629.87,1211.8 633.82,1211.8 v1(646.14,1224.11) ; v1(614.64,1224.11) 625.55,1235.02 C186.1@630.27,1235.02 635.23,1235.02 v1(646.14,1224.11)
  Bottom Layer w12: U7.E9@290.47,659.59 290.47,659.91 v1(306.14,675.58) 290.64,691.07 U7.D9@290.47,691.08 290.47,691.24 v1(274.64,707.07) 290.14,722.57 U7.C9@290.47,722.58 ; U9.R1@1109.36,344.63 v1(1125.11,328.87) v2(1181.38,328.87) ; U9.N1@1109.36,407.62 v1(1125.11,391.86)
  Bottom Layer w15: v1(677.63,1224.11) 697.63,1244.12 C190.1@710.78,1244.12 720.62,1244.12 v1(740.62,1224.11)
  Bottom Layer w20: v2(1226.33,981.48) 1236.69,991.84 C159.1@1236.69,1019.39 C143.1@1236.69,1066.64 1252.15,1066.64 1280,1094.49 1280,1231.3 v2(1295.74,1247.05)
  other v1: 1030.8,580.77
  other v2: 1617,205 1683,205 1775,205 1840,205
P2V8-VGEN6: C6.1 J2.47 R3.1 U1.41 | length 999.5
  Top Layer w10: U1.41@1745.64,542.49 1745.64,477.22 v2(1748,474.85)
  Top Layer w12: v2(1592.57,159.49) 1599,153.06 R3.1@1599,130
  Signal Layer 1 w15: v2(1592.57,159.49) 1592.57,160 1625,160 1649.89,184.89 1649.89,220.89 1723,294 1723,449.85 v2(1748,474.85)
  Signal Layer 2 w15: v2@1745.64,472.49 v2(1748,474.85) 1766.45,456.4 1823.3,456.4 1941.41,574.51 1941.41,672.94 1965.33,696.85 v2(1980.32,696.85)
  Bottom Layer w15: v2(1748,474.85) 1764.92,457.93 C6.1@1764.92,442.57 ; v2(1980.32,696.85) 2040.16,696.85 J2.47@2040.35,697.05
P3V0-VDDHIGH-SW2: C33.1 C34.1 C84.1 C85.1 D2.1 L4.2 U1.25 U3.H9 U3.J9 | length 551.7
  Top Layer w10: U3.J9@567.4,1523.32 v1(583.16,1539.07) U3.H9@567.41,1554.82 ; v2(1452.72,505.13) 1445.07,512.78 1445.07,561.18 1456.77,572.88 1456.77,610.92 1471.1,625.24 U1.25@1485.72,625.24
  Signal Layer 2 w15: v2(1452.72,505.13) 1465.03,492.82 1465.03,250.36 v2(1514,201.39)
  Bottom Layer w10: C84.1@557.24,1547.27 574.97,1547.27 v1(583.16,1539.07)
  other v2: 1377,201.39 1421.22,201.39 1462.96,201.39 1894.17,983.96 1925.66,983.96 1957.16,983.96 1894.17,1019.39 1925.66,1019.39 1957.16,1019.39 651.1,2061.61 681.1,2060.94 651.1,2086.61 681.1,2086.61 651.1,2111.61 681.1,2111.61
P3V3-LICELL: C9.1 U1.42 | length 90.5
  Top Layer w10: U1.42@1765.32,542.49 1765.32,502.73 v2(1770.05,498)
  Bottom Layer w10: C9.1@1759.02,537.45 1759.02,509.03 v2(1770.05,498)
P3V3-PERI: C92.1 C93.1 C95.1 C96.1 C97.1 C98.1 C99.1 C103.1 C104.1 C105.1 C106.1 C107.1 C108.1 C192.1 C193.1 C194.1 C195.1 C196.1 C197.1 J2.53 J2.54 J2.55 J2.56 R7.2 R8.1 R9.2 R11.1 R12.1 R13.1 R14.1 R15.1 R16.1 R17.1 R18.1 R21.2 R22.2 R23.2 R26.2 R42.2 R48.1 R49.1 R50.1 R51.1 R52.1 R53.1 R54.1 R55.1 R56.1 R57.1 R58.1 R59.1 R60.1 R61.1 R62.1 R63.1 U1.55 U2.C6 U2.E6 U2.F5 U2.J10 U2.K9 U2.M4 U2.N4 U2.P3 U2.P5 U3.G14 U3.G15 U3.G16 U3.G17 U3.J7 U3.K19 U3.L19 U3.M19 U3.N7 U3.P7 U3.P19 U3.R19 U14.4 | length 2818.1
  Top Layer w7: v1(488.65,1539.07) U3.J7@504.4,1523.32
  Top Layer w10: v2(142.28,1338.6) R17.1@165.9,1338.6 ; v2(142.28,1385.85) R18.1@165.9,1385.85 ; v2(142.28,1433.09) R14.1@165.9,1433.09 R26.2@165.9,1480.34 ; v2(142.28,1669.31) R21.2@165.9,1669.31 ; v1(488.65,1350.09) U3.P7@504.4,1365.84 ; v1(488.65,1381.59) U3.N7@504.4,1397.34 ; U3.G14@724.88,1586.32 v1(740.63,1602.07) ; U3.G15@756.37,1586.32 v1(772.12,1602.07) ; U3.G16@787.87,1586.32 v1(803.62,1602.07) ; U3.G17@819.36,1586.32 v1(835.11,1602.07) ; v1(866.61,1350.1) U3.P19@882.36,1365.84 ; U3.R19@882.36,1334.35 v1(898.1,1350.1) ; U3.M19@882.36,1428.84 v1(898.1,1444.58) U3.L19@882.36,1460.33 884.61,1462.58 884.61,1489.58 U3.K19@882.36,1491.83 882.59,1491.83 v1(898.1,1507.34) ; R8.1@1224.52,1145 R11.1@1224.52,1190 R13.1@1224.52,1235 v1(1248.5,1235) ; v2(1266.36,1345.02) 1239.45,1345.02 C96.1@1226.23,1358.24 1239.41,1371.42 v2(1266.36,1371.42) ; R56.1@1453.52,1308.85 R57.1@1453.52,1352.16 v2(1476.87,1352.16) ; R48.1@1453.52,1395.46 R59.1@1453.52,1438.77 v2(1476.87,1438.77) ; R49.1@1453.52,1482.08 R63.1@1453.52,1525.39 v2(1476.87,1525.39) ; R54.1@1453.52,1568.69 R52.1@1453.52,1612 v2(1476.87,1612) ; U2.C6@1468.5,1905.51 1478.7,1905.51 v1(1488.19,1915) 1497.67,1905.51 U2.E6@1507.87,1905.51 v1(1527.56,1905.51) ; v1(1515.75,1866.14) 1527.56,1877.95 U2.F5@1527.56,1885.83 ; v1(1582.68,1960.63) 1586.61,1964.57 U2.J10@1586.61,1984.25 ; U2.K9@1606.3,1964.57 v1(1625.98,1964.57) ; v1(1625.98,1866.14) U2.M4@1645.67,1866.14 U2.N4@1665.35,1866.14 ; R60.1@1644.51,1308.83 R62.1@1644.51,1352.14 v2(1667.87,1352.14) ; R61.1@1644.51,1395.45 R58.1@1644.51,1438.76 v2(1667.87,1438.76) ; R55.1@1644.51,1482.06 R50.1@1644.51,1525.37 v2(1667.87,1525.37) ; R51.1@1644.51,1568.68 R53.1@1644.52,1611.98 v2(1667.87,1611.98) ; U2.P3@1685.04,1846.46 1704.72,1846.46 v1(1716.54,1834.65) ; U2.P5@1685.04,1885.83 1696.85,1885.83 v1(1704.72,1893.7) ; U1.55@1789.02,802.41 1815.32,802.41 v2(1841.91,829) ; R7.2@1813.34,927.99 v2(1837.72,927.99) ; U14.4@1858.61,1559.96 1858.61,1617.69 v2(1858.74,1617.82)
  Top Layer w20: C97.1@209.13,1255.61 v2(245.62,1255.61)
  Bottom Layer w10: v2(142,1573) 164.07,1573 R22.2@165.9,1574.82 ; v2(142.28,1338.6) R16.1@165.9,1338.6 ; v2(142.28,1385.85) R15.1@165.9,1385.85 ; v2(142.28,1433.09) R12.1@165.9,1433.09 ; v2(142.28,1669.31) R23.2@165.9,1669.31 ; v1(488.65,1350.09) 486.76,1351.97 C104.1@486.76,1365.77 486.76,1379.71 v1(488.65,1381.59) ; C105.1@509.6,1527.19 500.54,1527.19 v1(488.65,1539.07) 501.17,1551.6 C106.1@509.6,1551.6 ; v1(740.63,1602.07) 744.65,1598.05 C92.1@756.45,1598.05 768.1,1598.05 v1(772.12,1602.07) 776.14,1598.05 C99.1@787.95,1598.05 799.6,1598.05 v1(803.62,1602.07) 807.64,1598.05 C98.1@819.44,1598.05 831.09,1598.05 v1(835.11,1602.07) 841.09,1596.09 C107.1@841.09,1582.7 ; C95.1@895.82,1428.37 895.82,1442.3 v1(898.1,1444.58) 896.21,1446.47 C103.1@896.21,1460.26 C93.1@896.21,1491.75 896.21,1505.46 v1(898.1,1507.34) ; v1@1486.57,1913.39 v1(1488.19,1915) ; v1(1515.75,1866.14) R42.2@1541.35,1866.14 ; C193.1@1559.06,1960.63 v1(1582.68,1960.63) ; v1(1625.98,1866.14) R9.2@1665.35,1866.14 ; v1(1625.98,1964.57) C194.1@1625.98,1992.13 ; C197.1@1716.54,1811.02 v1(1716.54,1834.65)
  Bottom Layer w15: C196.1@1452.72,1913.39 v1@1486.57,1913.39 ; v1(1488.19,1915) C195.1@1488.19,1944.88
  Bottom Layer w20: C108.1@1751.97,1874.02 1751.97,1839.65 v1(1752.44,1839.18) ; v1(1811.02,1838.58) C192.1@1811.02,1874.02
  Bottom Layer w25: v3(1978.72,546.34) 1979.42,547.05 J2.53@2040.35,547.05 J2.54@2187.99,547.05 2244.19,547.05 v3(2244.49,547.34) ; v3(1979.33,497.05) J2.55@2040.35,497.05 J2.56@2187.99,497.05 v3(2244.49,497.05)
  other v3: 2098.8,496.06 2133.86,496.06 2098.43,547.05 2133.86,547.05
PMIC-INT-B: R7.1 U1.1 U3.P6 | length 4446.1
  Top Layer w7: v1(457.16,1350.09) U3.P6@472.91,1365.84
  Top Layer w10: U1.1@1765.32,845.79 v2(1765.32,873.22) 1788.1,873.22 R7.1@1813.34,898.47
  Bottom Layer w4.7: v1(457.16,1350.09) 460.21,1350.09 476.35,1333.95 495,1333.95 504,1324.96 504,1250.06 513.79,1240.26 525.71,1240.26 535.5,1230.47 535.5,1154.77 525.71,1144.97 400.51,1144.97 74.13,1144.99 47.24,1118.11 47.24,361.3 153.54,255 201.69,255 263.78,192.91 263.78,151.22 338,77 1787,77 1925.66,215.66 1925.66,665.19 1894,696.85 1894,772 1856,810 1808,810 1765.32,852.68 v2(1765.32,873.22)
PMIC-ON-REQ: J2.14 U3.D11 | length 1672.3
  Top Layer w4.7: U3.D11@630.39,1680.8 v1(646.14,1696.56)
  Bottom Layer w4.7: v1(646.14,1696.56) 662.35,1680.35 743.81,1680.35 783.17,1719.71 938.62,1719.71 965.7,1692.62 1881.11,1692.62 1951.97,1621.76 2090.71,1621.76 2130.39,1582.07 2130.39,1558.76 2142.11,1547.05 J2.14@2187.99,1547.05
PMIC-POWERON: J2.16 U1.56 | length 1221.8
  Top Layer w4.7: U1.56@1789.02,822.09 1807.4,822.09 1848.65,863.34 2025.52,863.34 2078.22,810.64 2165.73,810.64 2189.44,834.35 2189.44,1472.15 2165.82,1495.77 v2(2126.45,1495.77)
  Bottom Layer w4.7: v2(2126.45,1495.77) 2186.72,1495.77 J2.16@2187.99,1497.05
PMIC-STBY-REQ: R2.1 U3.F11 | length 2450.2
  Top Layer w10: v1(614.64,1633.56) U3.F11@630.39,1617.81 ; R2.1@1710.09,928.06 v2(1736.34,928.06)
  Signal Layer 1 w4.5: v2(1736.34,928.06) 1755.25,909.16 1976.85,909.16 2012.28,944.59 2012.28,1035.14 1976.85,1070.57 1896.38,1070.57 1835.11,1131.84 1835.11,1625.69 v2(1807.55,1653.25)
  Bottom Layer w4.7: v1(614.64,1633.56) 630.39,1649.32 682.64,1649.32 698.7,1665.38 744.95,1665.38 760.39,1680.81 945.35,1680.81 976.85,1649.32 1096.83,1649.32 1112.89,1665.38 1151.58,1665.38 1182.65,1634.3 1203.76,1634.3 1234.5,1665.04 1795.76,1665.04 v2(1807.55,1653.25)
PMIC-VSNVS: C11.1 C90.1 D2.2 R1.2 R44.2 R45.2 R46.2 R47.2 R82.1 U1.43 U3.G11 U12.2 U12.5 U13.2 U13.5 | length 1493.1
  Top Layer w10: U12.5@75,1885 96,1885 105,1894 ; R82.1@105,1825 105,1894 ; v2(228.86,1954.95) R45.2@228.86,1930.11 ; R44.2@272.17,1930.11 R45.2@228.86,1930.11 ; U13.5@298.89,2104.96 v2(298.89,2148.89) ; v2(315.48,1954.95) R46.2@315.48,1930.11 R47.2@358.78,1930.11 ; U13.2@324.49,2019.96 324.49,1985.51 v2(325,1985) ; v1(614.63,1570.57) U3.G11@630.39,1586.32 ; U1.43@1789.02,566.19 1789.02,521.23 v2@1795.24,515.01 ; 105,1894 121.6,1910.6 U12.2@160,1910.6 197.83,1910.6 217.34,1930.11 R45.2@228.86,1930.11
  Top Layer w30: D2.2@788.15,2020 v2(788.15,2055) v2(788.15,2078.15) v2(788.15,2190)
  Signal Layer 1 w15: v2(1795.24,515.4) 1817.4,515.4 1891.9,589.9 1891.9,795.58 1908.78,812.46 v2(1908.78,838) 1940.78,870 v2(2125,870)
  Bottom Layer w10: v1(614.63,1570.57) 614.72,1570.66 C90.1@614.72,1590.18 ; v2(1795.24,515.4) 1799.57,519.73 C11.1@1799.57,537.84
  Bottom Layer w15: R1.2@1799.57,898.34 1802.9,898.34 1863.24,838 v2(1908.78,838)
  other v2: 788.15,2165
POR-B: J2.10 R1.1 U1.3 U3.C11 U14.2 | length 3776.6
  Top Layer w4.7: U3.C11@630.39,1712.3 614.64,1728.05 614.64,1829.84 655.44,1870.63 v2(718.38,1870.63) ; U1.3@1725.95,845.79 1725.95,869.99 v2(1732.75,876.79) ; U14.2@1933.61,1483.96 1901.57,1516 1901.57,1606.3 1917.03,1621.76 2102.83,1621.76 v2(2126.45,1645.38)
  Signal Layer 1 w4.5: v2(1732.75,876.79) 1752.44,896.48 1987.79,896.48 2047.71,956.4 2047.71,1566.64 v2(2126.45,1645.38)
  Bottom Layer w4.7: v2(718.38,1870.63) 718.38,1932.22 701.17,1949.43 701.17,1996.76 717.94,2013.53 789.87,2013.53 874.77,2098.43 1815.14,2098.43 1913.56,2000 1913.56,1775.41 1967.45,1721.52 2090.56,1721.52 2102.83,1709.25 2102.83,1682.98 2126.45,1659.36 v2(2126.45,1645.38) 2186.32,1645.38 J2.10@2187.99,1647.05 ; v2(1732.75,876.79) 1754.3,898.34 R1.1@1770.05,898.34
POWER-STATUS: J2.19 U3.R4 | length 3320.5
  Top Layer w4.7: v1(394.17,1350.1) 394.17,1349.78 409.92,1334.03 U3.R4@409.92,1334.35
  Signal Layer 2 w4.5: v1(394.17,1350.1) 307.55,1350.1 291.81,1365.85 241.14,1365.85 198.18,1408.81 198.18,1426.44 167.49,1457.12 129.35,1457.12 110.39,1476.09 110.39,1881.29 150.07,1920.97 220.94,1920.97 249.27,1949.3 249.27,1965.04 291.34,2007.12 335.11,2007.12 372.66,1969.57 482.14,1969.57 512.28,1999.71 783.93,1999.71 799.21,1984.43 865.44,1984.43 944,2062.99 1673.23,2062.99 1858.27,1877.95 1858.27,1736.4 1921.73,1672.94 1921.73,1452.46 v2(1976.85,1397.35)
  Bottom Layer w4.7: v2(1976.85,1397.35) 1977.15,1397.05 J2.19@2040.35,1397.05
TAMPER: R45.1 R64.2 U3.E11 | length 640.1
  Top Layer w4.7: v2(228.81,1857.98) 228.81,1900.55 R45.1@228.86,1900.59
  Top Layer w10: U3.E11@630.39,1649.31 v1(646.14,1665.06)
  Signal Layer 2 w4.5: v2(228.81,1857.98) 228.81,1842.62 328.18,1743.25 517.74,1743.25 524.84,1736.16 524.84,1691.16 535.74,1680.26 620.92,1680.26 636.12,1665.06 v1(646.14,1665.06)
  Bottom Layer w4.7: v2(228.81,1857.98) 228.81,1900.55 R64.2@228.86,1900.59
TEST-MODE: R44.1 R67.2 U3.E12 | length 606.4
  Top Layer w4.5: v2(272.12,1857.98) v2(272.12,1857.98) 272.17,1873.25
  Top Layer w4.7: 272.17,1873.25 R44.1@272.17,1900.59
  Top Layer w10: U3.E12@661.88,1649.31 v1(677.63,1665.06)
  Signal Layer 2 w4.5: v2(272.12,1857.98) 303.62,1826.48 411.72,1826.48 441.44,1796.76 441.44,1785.27 451.95,1774.75 463.45,1774.75 477.21,1761 571.69,1761 630.95,1701.74 630.95,1690.26 639.85,1681.35 661.34,1681.35 v1(677.63,1665.06)
  Bottom Layer w4.7: v2(272.12,1857.98) v2(272.12,1857.98) R67.2@272.17,1900.59
UART1-RXD: J2.22 U3.M3 | length 3090.6
  Top Layer w4.7: v1@362.27,1412.85 v1(362.43,1412.85) U3.M3@378.42,1428.84
  Signal Layer 2 w4.5: v1(362.43,1412.85) 331.42,1412.85 245.55,1498.72 203.83,1498.72 183.16,1519.39 183.16,1700.5 138.26,1745.39 138.26,1873.92 161.69,1897.35 250.63,1897.35 278.37,1925.09 464.85,1925.09 516.94,1873 544.32,1873 657.48,1759.84 783.46,1759.84 807.09,1783.46 944.88,1783.46 976.38,1751.97 1208.66,1751.97 1271.94,1688.69 1850.86,1688.69 1894.17,1645.38 1894.17,1405.22 1953.22,1346.17 v2(2126.45,1346.17)
  Bottom Layer w4.7: v2(2126.45,1346.17) 2127.33,1347.05 J2.22@2187.99,1347.05
UART1-TXD: J2.20 U3.M1 | length 3083.7
  Top Layer w4.7: v1(299.67,1413.09) U3.M1@315.43,1428.84
  Signal Layer 2 w4.5: v1(299.67,1413.09) 232.75,1413.09 169.76,1476.09 169.76,1692.62 126.45,1735.93 126.45,1877.66 158.23,1909.44 244.38,1909.44 271.65,1936.72 469.68,1936.72 520.86,1885.54 554.67,1885.54 668.84,1771.36 770.99,1771.36 798.84,1799.21 952.46,1799.21 983.96,1767.72 1220.47,1767.72 1287.69,1700.5 1858.74,1700.5 1905.98,1653.25 1905.98,1424.91 1957.16,1373.72 2102.83,1373.72 v2(2126.45,1397.35)
  Bottom Layer w4.5: v2(2126.45,1397.35) v2@2126.75,1397.05
  Bottom Layer w4.7: v2@2126.75,1397.05 J2.20@2187.99,1397.05
UART3-RXD: J2.26 U3.G22 | length 1554.6
  Top Layer w4.7: U3.G22@976.84,1586.32 v1(992.59,1602.07)
  Signal Layer 2 w4.5: v1(992.59,1602.07) 1008.34,1617.82 1089.88,1617.82 1110.7,1597 1135.77,1597 1146.14,1586.64 1171.72,1586.64 1199.12,1614.04 1228.97,1614.04 1256.37,1641.44 1724.38,1641.44 1775.56,1590.26 1827.13,1590.26 1851,1566.39 1851,1342.09 1925.66,1267.43 2108.64,1267.43 v2(2128.33,1247.74)
  Bottom Layer w4.5: v2(2128.33,1247.74) v2@2129.02,1247.05
  Bottom Layer w4.7: v2@2129.02,1247.05 J2.26@2187.99,1247.05